# Altium PCB MCU-main-board-PCBPcbDoc.PcbDoc (part 1 of 2)
Units mm, origin at the board's own origin, x right, y up, seen from the top; angles counter-clockwise.
Board outline 55 x 70 mm, 2 copper layers (Top Layer, Bottom Layer); 72 components, 81 nets, 304 pads, 97 vias.
Unrouted connection lines stored in the file: 15.
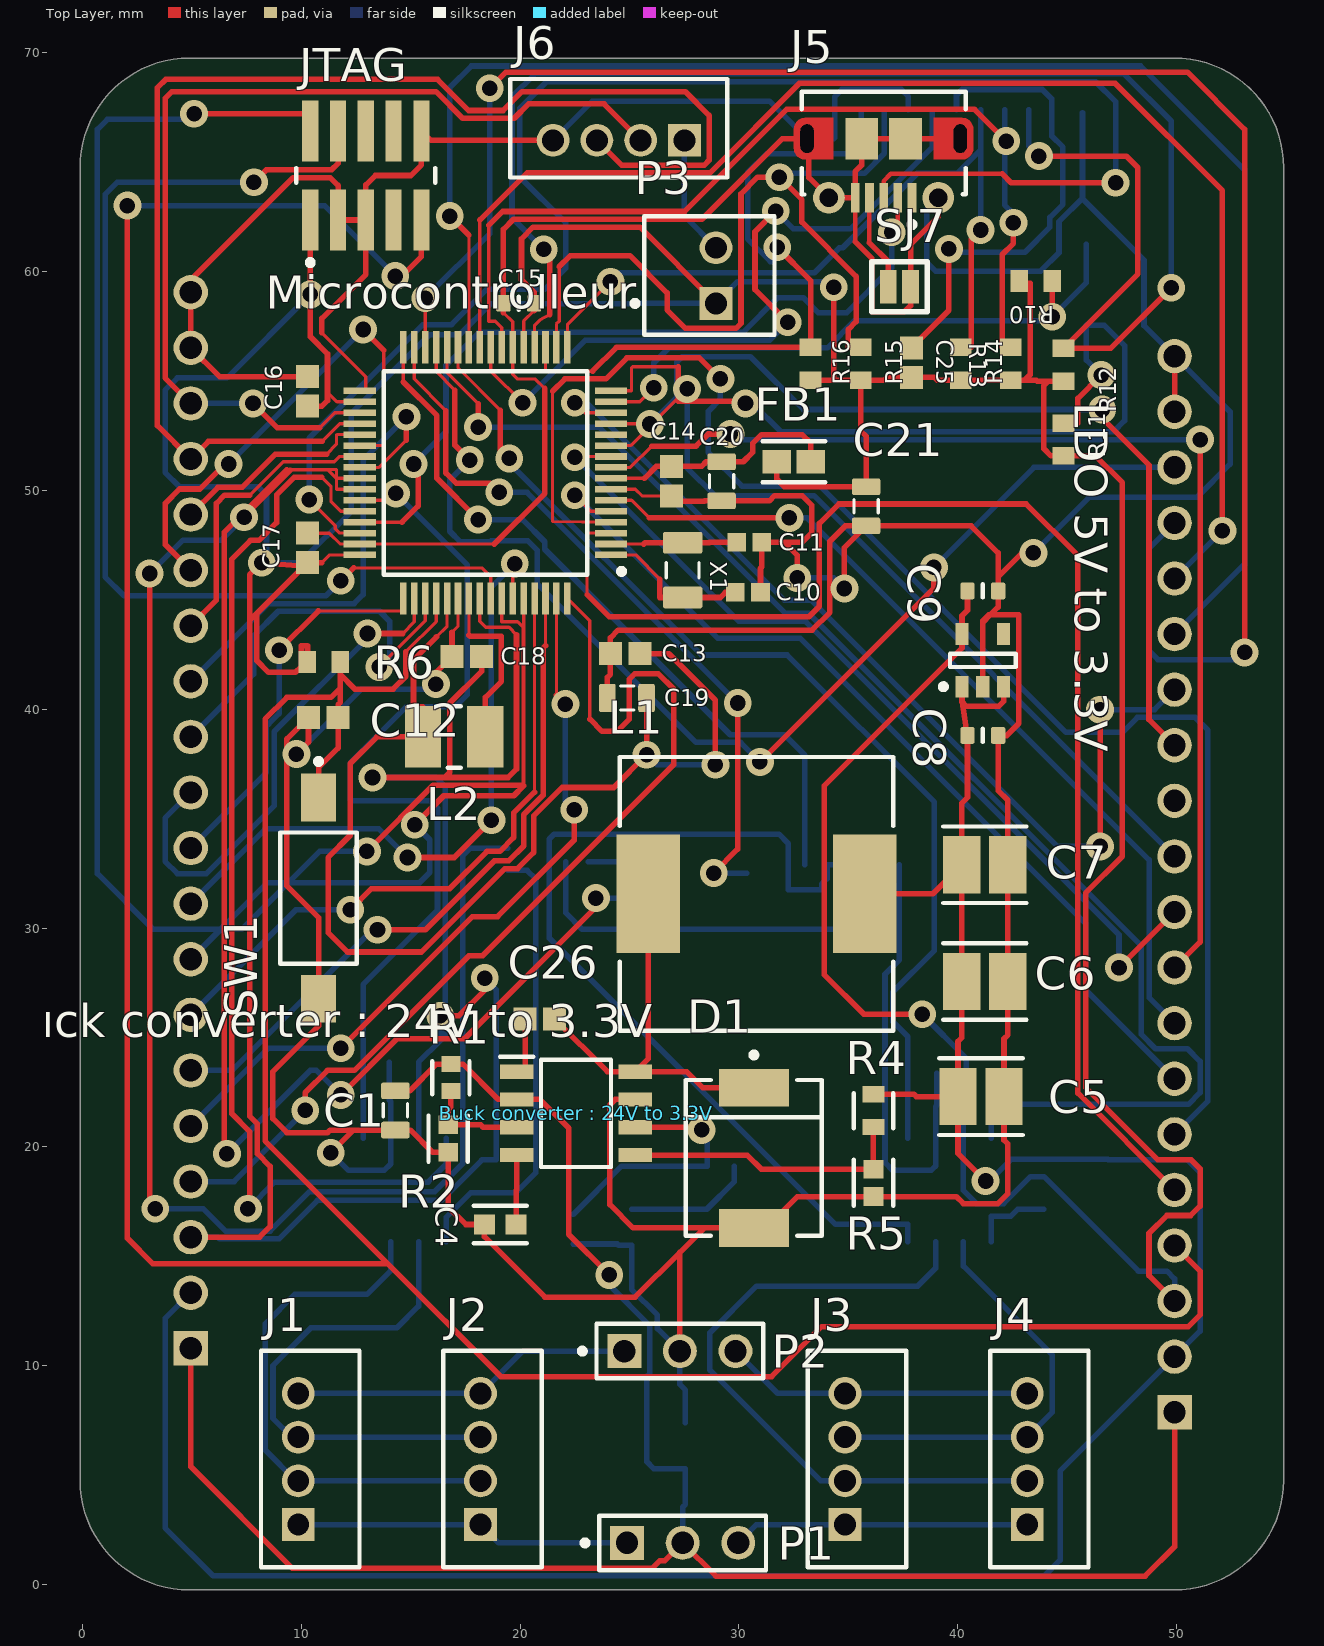
[diagram p0: Top Layer view]
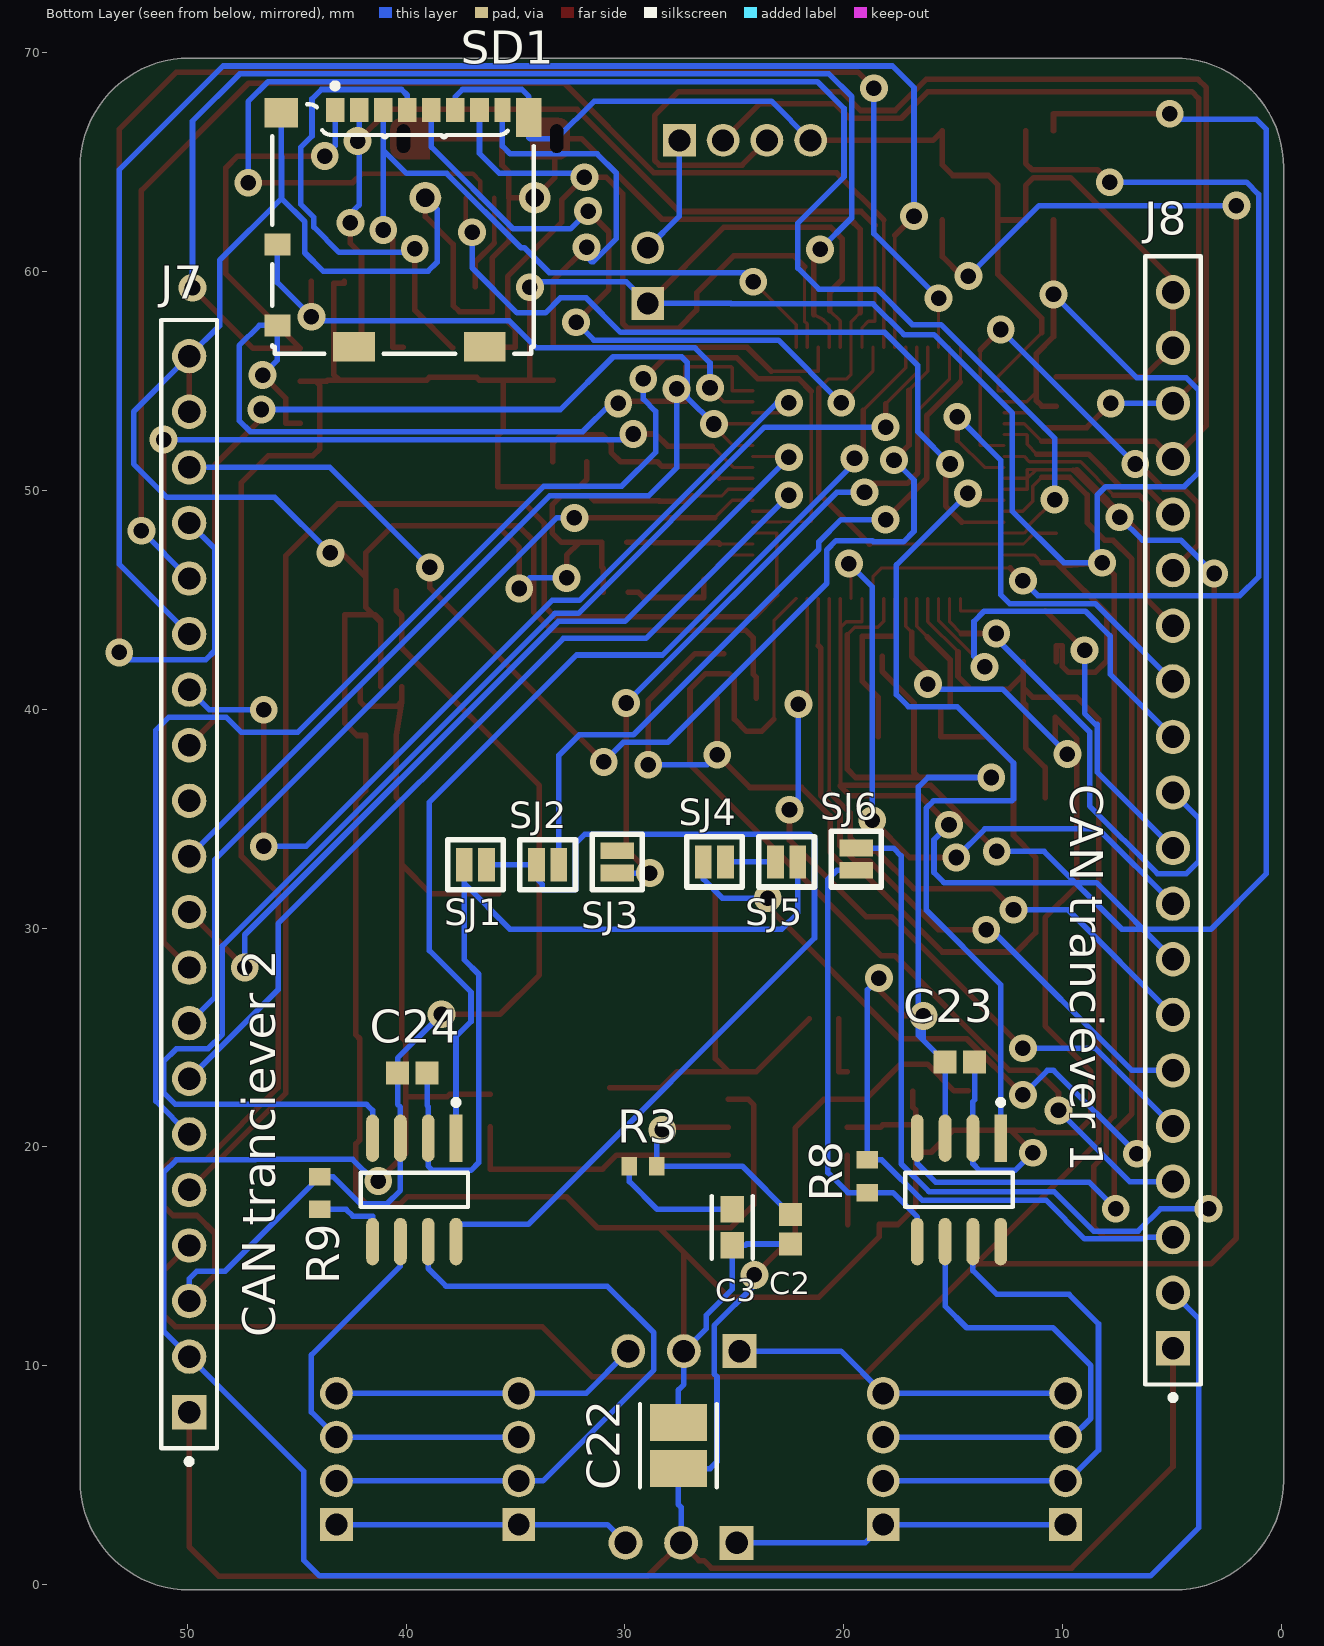
[diagram p1: Bottom Layer view, seen from below]
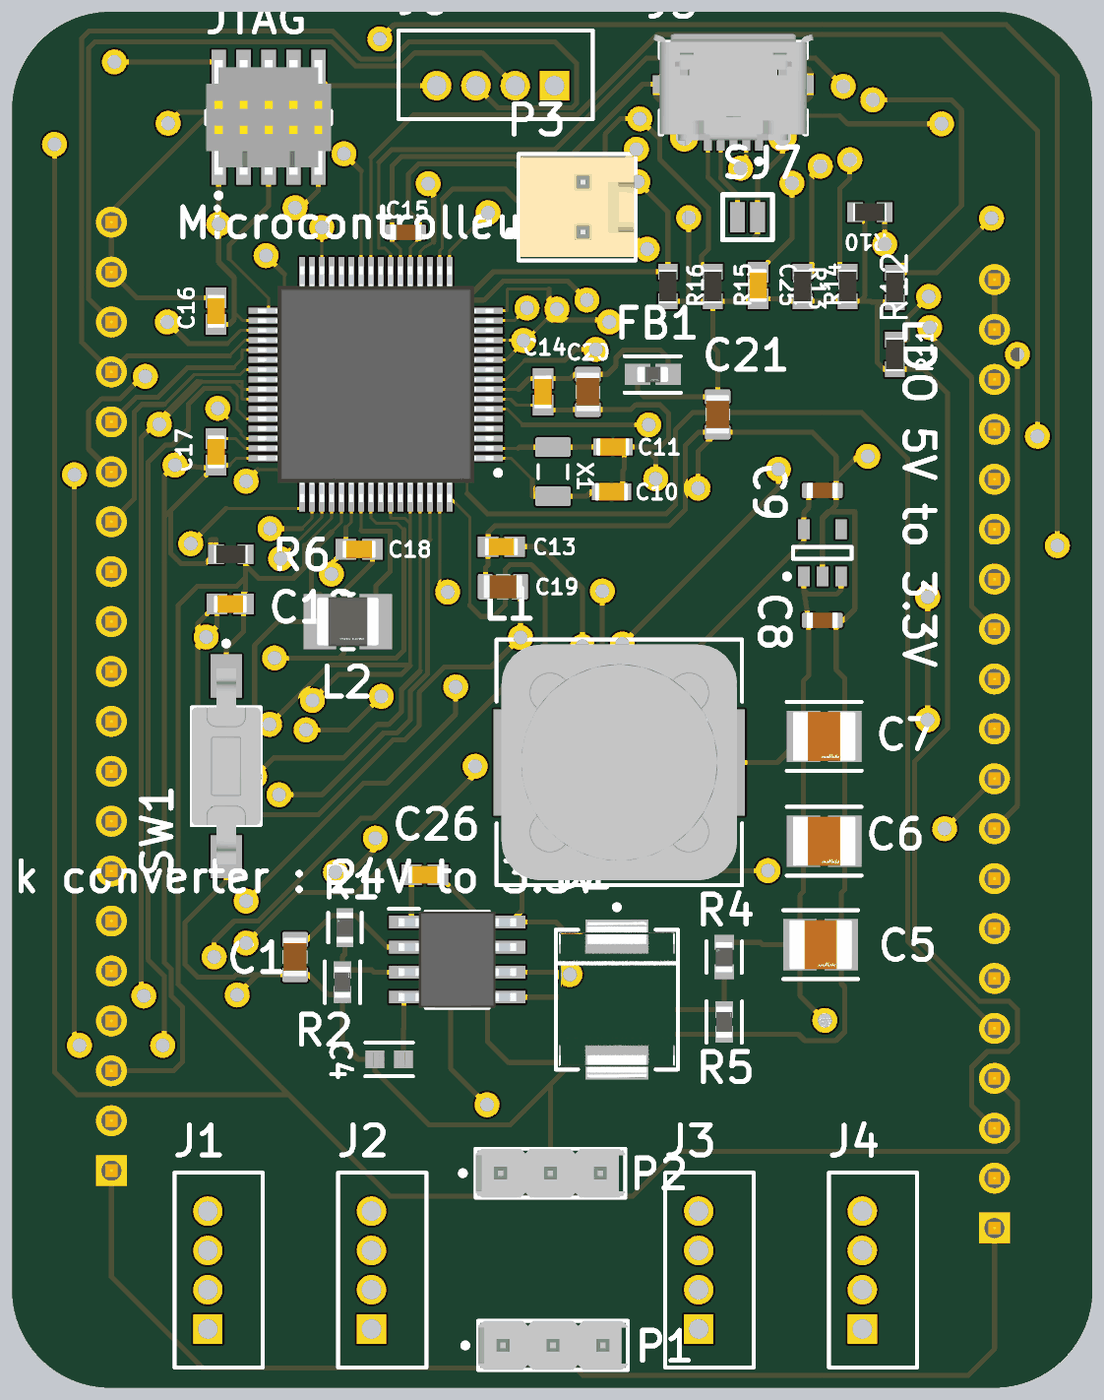
[diagram p3: 3D render of the assembled board from above, using the file's embedded part models]
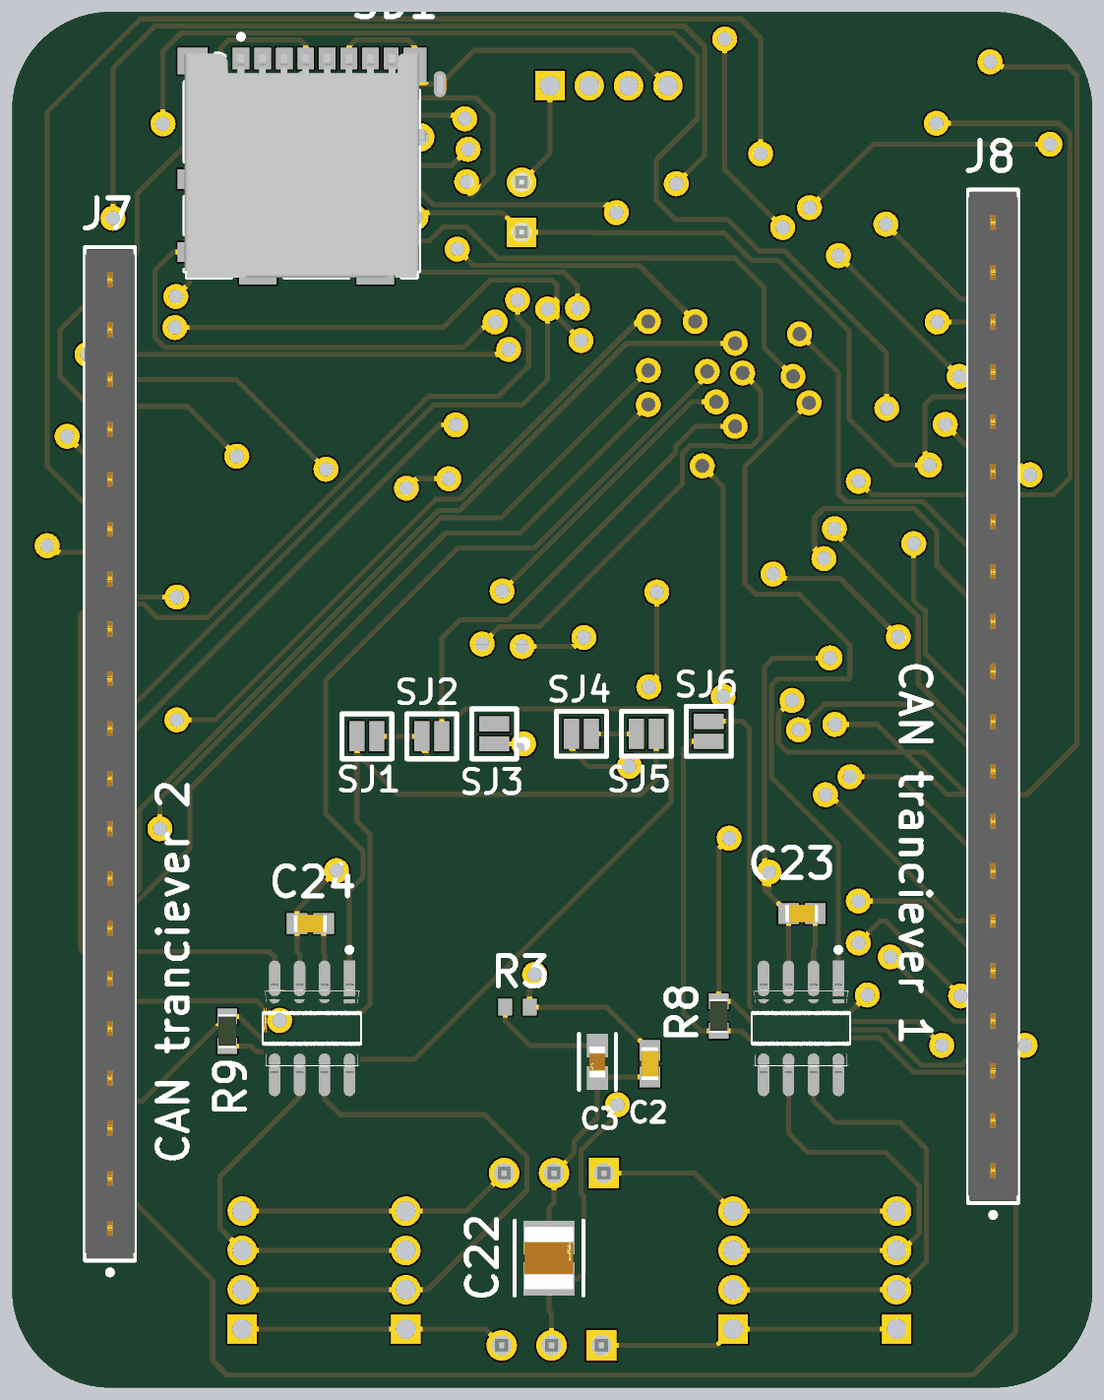
[diagram p4: 3D render of the assembled board from below, using the file's embedded part models]

## Layer stack, top to bottom
Top Solder: solder mask 0.0102, Solder Resist, Dk 3.5
Top Layer: signal copper 0.0356
Dielectric 1: dielectric 0.32, FR-4, Dk 4.8
Bottom Layer: signal copper 0.0356
Bottom Solder: solder mask 0.0102, Solder Resist, Dk 3.5

## Board outline
-0.104,4.755 -0.104,64.755 cw(c4.896,64.755) 4.896,69.755 49.896,69.755 cw(c49.896,64.755) 54.896,64.755 54.896,4.755 cw(c49.896,4.755) 49.896,-0.245 4.896,-0.245 cw(c4.896,4.755)

## Design rules (kind name [scope] priority, off if disabled: settings)
Clearance [All] p1: gap=0.254 ignorepadtopadclearanceinfootprint=TRUE except(0: Arc-Hole Track-Hole SMDPad-Hole THPad-Hole Via-Hole Fill-Hole Poly-Hole Region-Hole Text-Hole; 0.1: Arc-Arc Arc-Track Track-Track SMDPad-SMDPad)
PolygonConnect [All] p1: connectstyle=Relief reliefconductorwidth=0.254 reliefentries=4 polygonreliefangle="90 Angle" airgapwidth=0.254
RoutingVias [All] p1: holewidth=0.711 width=1.27 viastyle="Through Hole" minholewidth=0.711 minwidth=1.27 maxholewidth=0.711 maxwidth=1.27
SMDNeckDown [All] p1: percent=50.000
SolderMaskExpansion [All] p1: expansion=0.102 istentingtop=FALSE
Width [All] p1: maxlimit=1 minlimit=0.1 preferedwidth=0.254 minimp=50.000000 maximp=50.000000 favimp=50.000000
30 further rules are at their usual default settings.

## Classes and differential pairs
component class MCU-main-board-schematic: "Buck converter : 24V to 3.3V" C1 C2 C3 C4 C5 C6 C7 C8 C9 C10 C11 C12 C13 C14 C15 C16 C17 C18 C19 C20 C21 C22 C26 D1 FB1 J7 J8 L1 L2 "LDO 5V to 3.3V" Microcontrolleur R1 R2 R3 R4 R5 R6 SW1 X1
component class MCU-connectors-schematic: C23 C24 C25 "CAN tranciever 1" "CAN tranciever 2" J1 J2 J3 J4 J5 J6 JTAG P1 P2 P3 R8 R9 R10 R11 R12 R13 R14 R15 R16 SD1 SJ1 SJ2 SJ3 SJ4 SJ5 SJ6 SJ7

## Components (designator, comment, footprint, x,y, rotation, side; value= is the part's Value field where it differs from the comment)
"Buck converter : 24V to 3.3V" "TPS54233QDRQ1" SOIC127P600X175-8N 22.558,21.532 r0 top
C1 "Capacitor 10µF +/-20% 25V 0805" CAPC0805(2012)145_L 14.303,21.67 r90 top value=10µF
C2 "Capacitor 10 pF +/- 5% 50 V 0603" CAPC1608X90X40ML10T20 22.431,16.238 r90 bottom value=10pF
C3 "1nF" FP-0603-L_1_6_0_15-W_0_81-IPC_A 25.098,16.325 r270 bottom
C4 "8.2nF" FP-CL10-IPC_B 19.094,16.452 r180 top
C5 "47uF" FP-GRM32E-0_3-0_2-IPC_C 41.065,22.294 r0 top
C6 "47uF" FP-GRM32E-0_3-0_2-IPC_C 41.24,27.559 r0 top
C7 "47uF" FP-GRM32E-0_3-0_2-IPC_C 41.24,32.893 r0 top
C8 "Capacitor 1µF +/-40% 50V 0603" CAPC0603(1608)100_L 41.148,38.8 r180 top value=1µF
C9 "Capacitor 1µF +/-40% 50V 0603" CAPC0603(1608)100_L 41.148,45.404 r180 top value=1µF
C10 "18pF" CAPC1608X90X40LL10T20 30.413,45.339 r180 top
C11 "18pF" CAPC1608X90X40LL10T20 30.48,47.625 r180 top
C12 "Capacitor 100 nF +/-10% 50 V 0603" CAPC1608X90X40ML10T20 11.009,39.624 r0 top value=100nF
C13 "Capacitor 100 nF +/-10% 50 V 0603" CAPC1608X90X40ML10T20 24.805,42.545 r0 top value=100nF
C14 "Capacitor 100 nF +/-10% 50 V 0603" CAPC1608X90X40ML10T20 26.924,50.419 r90 top value=100nF
C15 "Capacitor 1µF +/-40% 50V 0603" CAPC0603(1608)100_L 19.939,58.547 r0 top value=1µF
C16 "Capacitor 100 nF +/-10% 50 V 0603" CAPC1608X90X40ML10T20 10.287,54.523 r270 top value=100nF
C17 "Capacitor 100 nF +/-10% 50 V 0603" CAPC1608X90X40ML10T20 10.287,47.371 r270 top value=100nF
C18 "Capacitor 100 nF +/-10% 50 V 0603" CAPC1608X90X40ML10T20 17.566,42.418 r0 top value=100nF
C19 "Capacitor 4.7µF +/-40% 25V 0805" CAPC0805(2012)145_L 24.892,40.513 r0 top value=4.7µF
C20 "Capacitor 10µF +/-20% 25V 0805" CAPC0805(2012)145_L 29.21,50.419 r90 top value=10µF
C21 "Capacitor 10µF +/-20% 25V 0805" CAPC0805(2012)145_L 35.814,49.276 r90 top value=10µF
C22 "47uF" FP-GRM32E-0_3-0_2-IPC_C 27.559,6.35 r90 bottom
C23 "Capacitor 100 nF +/-10% 50 V 0603" CAPC1608X90X40ML10T20 14.692,23.876 r0 bottom value=100nF
C24 "Capacitor 100 nF +/-10% 50 V 0603" CAPC1608X90X40ML10T20 39.711,23.368 r0 bottom value=100nF
C25 "Capacitor 100 nF +/-10% 50 V 0603" CAPC1608X90X40ML10T20 37.879,55.838 r270 top value=100nF
C26 "Capacitor 100 nF +/-10% 50 V 0603" CAPC1608X90X40ML10T20 20.907,25.85 r180 top value=100nF
"CAN tranciever 1" "TCAN337GDR" FP-D0008A-IPC_B 14.732,18.034 r270 bottom
"CAN tranciever 2" "TCAN337GDR" FP-D0008A-IPC_B 39.624,18.034 r270 bottom
D1 "500mV, 3A" FP-95402-MFG 30.686,19.5 r270 top
FB1 "BLM18SG221TN1D" FP-BLM18-0_15-t0_5-IPC_A 32.512,51.308 r0 top
J1 "S04B-PASK-2-LF-SN" JST-B4B-PH-K-S_V 10.414,5.737 r90 top
J2 "S04B-PASK-2-LF-SN" JST-B4B-PH-K-S_V 18.743,5.737 r90 top
J3 "S04B-PASK-2-LF-SN" JST-B4B-PH-K-S_V 35.401,5.737 r90 top
J4 "S04B-PASK-2-LF-SN" JST-B4B-PH-K-S_V 43.73,5.737 r90 top
J5 "Micro-USB B" USB-MICRO-B_V 36.616,64.723 r180 top
J6 "S04B-PASK-2-LF-SN" JST-B4B-PH-K-S_V 24.511,66.548 r180 top
J7 "ESQ-120-14-G-S" FP-ESQ-120-14-G-S-MFG 49.911,32.004 r90 bottom
J8 "ESQ-120-14-G-S" FP-ESQ-120-14-G-S-MFG 4.953,34.925 r90 bottom
JTAG "FTSH-105-01-L-DV-K" SMTC-FTSH-105-01-L-DV-K_V 12.954,64.392 r0 top
L1 "33uH, 45mOhm" WE-PD-XXL 30.813,31.565 r0 top
L2 "10uH" FP-CB3225-IPC_A 16.989,38.735 r0 top
"LDO 5V to 3.3V" "AP7365-33WG-7" SOT95P245X110-5N 41.148,42.229 r90 top
Microcontrolleur "ATSAME51J20A-AF" QFP50P1200X1200X120-64N 18.415,50.8 r180 top
P1 "22-28-4033" MOLX-22-28-4033_V 27.432,1.905 r0 top
P2 "22-28-4033" MOLX-22-28-4033_V 27.305,10.668 r0 top
P3 "61900211121" 61900211121 28.656,59.817 r270 top
R1 "169kOhm" FP-CRCW0603-e3-IPC_C 16.843,23.163 r90 top
R2 "19.6kOhm" FP-RR0816-IPC_C 16.716,20.38 r90 top
R3 "52.3kOhm" RESC1608X55X30LL15T15 29.172,19.119 r180 bottom
R4 "10.2kOhm, 1%" FP-CRCW0603-e3-MFG 36.147,21.659 r90 top
R5 "1.96kOhm, 1%" FP-RR0816-IPC_C 36.147,18.357 r90 top
R6 "Resistor 10k +/-1% 0603 100 mW" RESC1608X55X25ML10T15 11.037,42.164 r0 top value=10k
R8 "Resistor 10k +/-1% 0603 100 mW" RESC1608X55X25ML10T15 18.923,18.657 r270 bottom value=10k
R9 "Resistor 10k +/-1% 0603 100 mW" RESC1608X55X25ML10T15 43.942,17.895 r270 bottom value=10k
R10 "Resistor 10k +/-1% 0603 100 mW" RESC1608X55X25ML10T15 43.573,59.563 r0 top value=10k
R11 "Resistor 10k +/-1% 0603 100 mW" RESC1608X55X25ML10T15 44.831,52.324 r90 top value=10k
R12 "Resistor 10k +/-1% 0603 100 mW" RESC1608X55X25ML10T15 44.831,55.741 r90 top value=10k
R13 "Resistor 10k +/-1% 0603 100 mW" RESC1608X55X25ML10T15 42.426,55.788 r90 top value=10k
R14 "Resistor 10k +/-1% 0603 100 mW" RESC1608X55X25ML10T15 40.14,55.788 r90 top value=10k
R15 "Resistor 10k +/-1% 0603 100 mW" RESC1608X55X25ML10T15 35.568,55.788 r90 top value=10k
R16 "Resistor 10k +/-1% 0603 100 mW" RESC1608X55X25ML10T15 33.282,55.788 r90 top value=10k
SD1 "104031-0811" MOLX-104031-0811_V 40.132,61.976 r0 bottom
SJ1 "custom Solder bridge" "custom Solder bridge-Footprint-1" 36.83,32.893 r180 bottom
SJ2 "custom Solder bridge" "custom Solder bridge-Footprint-1" 33.528,32.893 r0 bottom
SJ3 "custom Solder bridge" "custom Solder bridge-Footprint-1" 30.353,33.02 r90 bottom
SJ4 "custom Solder bridge" "custom Solder bridge-Footprint-1" 22.606,33.02 r0 bottom
SJ5 "custom Solder bridge" "custom Solder bridge-Footprint-1" 25.908,33.02 r180 bottom
SJ6 "custom Solder bridge" "custom Solder bridge-Footprint-1" 19.431,33.147 r270 bottom
SJ7 "custom Solder bridge" "custom Solder bridge-Footprint-1" 37.338,59.309 r180 top
SW1 "FSMSM" TECO-FSMSM-2_V 10.795,31.369 r270 top
X1 "32.768kHz" EPSON-FC-135_V 27.432,46.355 r90 top

## Footprints (in the part's own frame and the unit in brackets; to place one, negate y for a bottom-side part, rotate by r counter-clockwise, add the part's x,y. Pads: shape width x height; smd on the part's side, far side on the other; paste and mask are expansions set on the pad)
61900211121 [mm] "2.54mm Male Locking Header, 2p"
  rect 1.5x1.5 hole 1: 1(1.27,0.3)
  round 1.5 hole 1: 2(-1.27,0.3)
  silkscreen extent -2.71,-3.52 2.71,2.97, body extent -2.54,-2.9 2.54,2.9, height 11.53
CAPC0603(1608)100_L [mm] "Chip Capacitor, Body 1.6x0.8mm, Height 1.0mm, IPC High Density"
  rrect25% 0.66x0.76 smd: 1(-0.7,0) 2(0.7,0)
  silkscreen extent 0,-0.3 0,0.3, body extent -0.8,-0.4 0.8,0.4, height 0.95
CAPC0805(2012)145_L [mm] "Chip Capacitor, Body 2.0x1.2mm, Height 1.45mm, IPC High Density"
  rrect25% 0.76x1.3 smd: 1(-0.9,0) 2(0.89,0)
  silkscreen extent -0.3,-0.55 0.3,0.55, body extent -1,-0.6 1,0.6, height 1.45
CAPC1608X90X40LL10T20 [mm] "Chip Capacitor, 2-Leads, Body 1.7x0.9mm, IPC High Density"
  rect 0.85x0.85 smd: 1(-0.575,0) 2(0.575,0)
  body extent -0.85,-0.45 0.85,0.45, height 0.9
CAPC1608X90X40ML10T20 [mm] "Chip Capacitor, 2-Leads, Body 1.70x0.90mm, IPC Low Density"
  rect 1.05x1.05 smd: 1(-0.675,0) 2(0.675,0)
  body extent -0.85,-0.45 0.85,0.45, height 0.9
"custom Solder bridge-Footprint-1" [mil]
  rect 30x60 smd: 1(-20,0) 2(20,0)
  silkscreen extent -50,-45 50,45
EPSON-FC-135_V [mm] "SMD, 2-Leads, Body 3.2x1.5mm"
  rrect20% 1x1.8 smd: 1(-1.25,0) 2(1.25,0)
  silkscreen extent -0.35,-0.75 0.35,0.75, body extent -1.6,-0.75 1.6,0.75, height 0.9
FP-0603-L_1_6_0_15-W_0_81-IPC_A [mil]
  rect 47.5x42.06 smd paste+0 mask+0: 1(-32.51,0) 2(32.51,0)
  silkscreen extent -56,-37 56,37, body extent -31,-16 31,16, height 35
FP-95402-MFG [mm]
  rect 1.72x3.2 smd paste+0 mask+0: 1(-3.205,0) 2(3.205,0)
  silkscreen extent -4.82,-3.11 3.55,3.11, body extent -4.17,-3.21 4.17,3.21, height 0.25
FP-BLM18-0_15-t0_5-IPC_A [mm]
  rect 1.306x1.058 smd paste+0 mask+0: 1(-0.776,0) 2(0.776,0)
  silkscreen extent -1.43,-0.93 1.43,0.93, body extent -1.93,-1.03 1.93,1.03, height 0.25
FP-CB3225-IPC_A [mm]
  rect 1.654x2.806 smd paste+0 mask+0: 1(-1.426,0) 2(1.426,0)
  silkscreen extent -0.3,-1.4 0.3,1.4, body extent -2.75,-1.9 2.75,1.9, height 0.25
FP-CL10-IPC_B [mm]
  rect 0.958x0.912 smd paste+0 mask+0: 1(-0.727,0) 2(0.727,0)
  silkscreen extent -1.21,-0.86 1.21,0.86, body extent -1.46,-0.71 1.46,0.71, height 0.25
FP-CRCW0603-e3-IPC_C [mm]
  rect 0.735x0.862 smd paste+0 mask+0: 1(-0.615,0) 2(0.615,0)
  silkscreen extent -0.75,-0.85 0.75,0.85, body extent -1.08,-0.58 1.08,0.58, height 0.25
FP-CRCW0603-e3-MFG [mm]
  rect 0.75x1 smd paste+0 mask+0: 1(-0.75,0) 2(0.75,0)
  silkscreen extent -0.8,-0.9 0.8,0.9, body extent -1.22,-0.6 1.22,0.6, height 0.25
FP-D0008A-IPC_B [mm]
  rect 2.169x0.582 smd paste+0 mask+0: 1(-2.364,1.905)
  rrect100% 2.169x0.582 smd paste+0 mask+0: 2(-2.364,0.635) 3(-2.364,-0.635) 4(-2.364,-1.905) 5(2.364,-1.905) 6(2.364,-0.635) 7(2.364,0.635) 8(2.364,1.905)
  silkscreen extent -4.12,-2.45 0.78,2.45, body extent -3,-2.45 3,2.45, height 1.75
FP-ESQ-120-14-G-S-MFG [mm]
  rect 1.57x1.57 hole 1.02 paste-1000 mask+0: 1(-24.13,0)
  round 1.57 hole 1.02 paste-1000 mask+0: 2(-21.59,0) 3(-19.05,0) 4(-16.51,0) 5(-13.97,0) 6(-11.43,0) 7(-8.89,0) 8(-6.35,0) 9(-3.81,0) 10(-1.27,0) 11(1.27,0) 12(3.81,0) 13(6.35,0) 14(8.89,0) 15(11.43,0) 16(13.97,0) 17(16.51,0) 18(19.05,0) 19(21.59,0) 20(24.13,0)
  silkscreen extent -26.51,-1.27 25.78,1.27, body extent -25.65,-1.27 25.65,1.27, height 11.3
FP-GRM32E-0_3-0_2-IPC_C [mm]
  rect 1.703x2.606 smd paste+0 mask+0: 1(-1.051,0) 2(1.051,0)
  silkscreen extent -1.9,-1.75 1.9,1.75, body extent -2,-1.45 2,1.45, height 0.25
FP-RR0816-IPC_C [mm]
  rect 0.855x0.906 smd paste+0 mask+0: 1(-0.626,0) 2(0.626,0)
  silkscreen extent -1.05,-0.9 1.05,0.9, body extent -1.15,-0.6 1.15,0.6, height 0.25
JST-B4B-PH-K-S_V [mm] "Connector, 4-Leads, Body 9.9x4.5mm, Pitch 2mm"
  rect 1.5x1.5 hole 1: 1(-3,0.55)
  round 1.5 hole 1: 2(-1,0.55) 3(1,0.55) 4(3,0.55)
  silkscreen extent -4.95,-2.25 4.95,2.25, body extent -4.95,-2.25 4.95,2.25, height 6
MOLX-22-28-4033_V [mm] "THD, 3-Leads, Body 7.62x2.49mm, Pitch 2.54mm"
  rect 1.55x1.55 hole 1.02: 1(-2.54,0)
  round 1.55 hole 1.02: 2(0,0) 3(2.54,0)
  silkscreen extent -4.58,-1.25 3.81,1.25, body extent -3.81,-1.24 3.81,1.24, height 8.38
MOLX-104031-0811_V [mm] "Micro SD, 8-Leads, Body 11.95x11.4mm, Pitch 1.1mm"
  rect 0.85x1.1 smd: 1(3.113,-5.412) 2(2.012,-5.412) 3(0.913,-5.412) 4(-0.188,-5.412) 5(-1.287,-5.412) 6(-2.387,-5.412) 7(-3.488,-5.412)
  rect 0.75x1.1 smd: 8(-4.538,-5.412)
  rect 1.2x1 smd: 9(5.748,0.738) 10(5.748,4.437)
  rect 1.55x1.35 smd: 11(5.573,-5.288)
  rect 1.17x1.8 smd: 12(-5.748,-5.063)
  rect 1.9x1.35 smd: 13(-3.723,5.412) 14(2.247,5.412)
  silkscreen extent -5.97,-6.64 5.98,5.74, body extent -5.97,-5.66 5.98,5.74, height 1.45
QFP50P1200X1200X120-64N [mm]
  rect 1.475x0.3 smd: 1(-5.738,3.75) 2(-5.738,3.25) 3(-5.738,2.75) 4(-5.738,2.25) 5(-5.738,1.75) 6(-5.738,1.25) 7(-5.738,0.75) 8(-5.738,0.25) 9(-5.738,-0.25) 10(-5.738,-0.75) 11(-5.738,-1.25) 12(-5.738,-1.75) 13(-5.738,-2.25) 14(-5.738,-2.75) 15(-5.738,-3.25) 16(-5.738,-3.75) 33(5.738,-3.75) 34(5.738,-3.25) 35(5.738,-2.75) 36(5.738,-2.25) 37(5.738,-1.75) 38(5.738,-1.25) 39(5.738,-0.75) 40(5.738,-0.25) 41(5.738,0.25) 42(5.738,0.75) 43(5.738,1.25) 44(5.738,1.75) 45(5.738,2.25) 46(5.738,2.75) 47(5.738,3.25) 48(5.738,3.75)
  rect 0.3x1.475 smd: 17(-3.75,-5.738) 18(-3.25,-5.738) 19(-2.75,-5.738) 20(-2.25,-5.738) 21(-1.75,-5.738) 22(-1.25,-5.738) 23(-0.75,-5.738) 24(-0.25,-5.738) 25(0.25,-5.738) 26(0.75,-5.738) 27(1.25,-5.738) 28(1.75,-5.738) 29(2.25,-5.738) 30(2.75,-5.738) 31(3.25,-5.738) 32(3.75,-5.738) 49(3.75,5.738) 50(3.25,5.738) 51(2.75,5.738) 52(2.25,5.738) 53(1.75,5.738) 54(1.25,5.738) 55(0.75,5.738) 56(0.25,5.738) 57(-0.25,5.738) 58(-0.75,5.738) 59(-1.25,5.738) 60(-1.75,5.738) 61(-2.25,5.738) 62(-2.75,5.738) 63(-3.25,5.738) 64(-3.75,5.738)
  silkscreen extent -6.35,-4.65 4.65,4.65, body extent -6,-6 6,6, height 1.2
RESC1608X55X25ML10T15 [mm] "Chip Resistor, 2-Leads, Body 1.70x0.90mm, IPC Low Density"
  rect 0.8x1 smd: 1(-0.75,0) 2(0.75,0)
  body extent -0.85,-0.45 0.85,0.45, height 0.55
RESC1608X55X30LL15T15 [mm] "Chip Resistor, 2-Leads, Body 1.60x0.80mm, IPC High Density"
  rect 0.7x0.85 smd: 1(-0.625,0) 2(0.625,0)
  body extent -0.87,-0.48 0.87,0.48, height 0.55
SMTC-FTSH-105-01-L-DV-K_V [mm] "CONN, 10-Leads, Body 6.35x3.43mm, Pitch 1.27mm"
  rect 0.74x2.79 smd: 1(-2.54,-2.035) 2(-2.54,2.035) 3(-1.27,-2.035) 4(-1.27,2.035) 5(0,-2.035) 6(0,2.035) 7(1.27,-2.035) 8(1.27,2.035) 9(2.54,-2.035) 10(2.54,2.035)
  silkscreen extent -3.17,-4.1 3.17,0.34, body extent -3.17,-2.92 3.18,2.92, height 6.12
SOIC127P600X175-8N [mm]
  rect 1.525x0.65 smd: 1(-2.712,1.905) 2(-2.712,0.635) 3(-2.712,-0.635) 4(-2.712,-1.905) 5(2.712,-1.905) 6(2.712,-0.635) 7(2.712,0.635) 8(2.712,1.905)
  silkscreen extent -3.47,-2.45 1.6,2.58, body extent -3,-2.45 3,2.45, height 1.75
SOT95P245X110-5N [mm] "SOT23, 5-Leads, Body 2,90x2,45mm, Pitch 0,95mm, IPC Medium Density"
  rect 1x0.6 smd: 1(-1.2,0.95) 2(-1.2,0) 3(-1.2,-0.95) 4(1.2,-0.95) 5(1.2,0.95)
  silkscreen extent -1.32,-1.5 0.3,1.92, body extent -0.7,-1.5 0.7,1.5, height 1.1
TECO-FSMSM-2_V [mm] "SMD, 2-Leads, Body 6x3.5mm, Pitch 9.19mm"
  rect 2.2x1.6 smd: 1(-4.595,0)
  rect 2.18x1.6 smd: 2(4.595,0)
  silkscreen extent -6.37,-1.75 3,1.75, body extent -4.98,-1.75 4.98,1.75, height 4.4
USB-MICRO-B_V [mm] "USB, MICRO B, Body 7.491x4.695 mm, Pitch 0.65 mm"
  rect 0.4x1.35 smd: 1(-1.3,1.35) 2(-0.65,1.35) 3(0,1.35) 4(0.65,1.35) 5(1.3,1.35)
  round 1.45 hole 0.85: 6(-2.5,1.35) 7(2.5,1.35)
  rrect50% 0x0 hole 0.6 slot 1.3 at 90 deg: 8(-3.5,-1.35) 11(3.5,-1.35)
  rect 1.5x1.9 smd: 9(-1,-1.35) 10(1,-1.35)
  Top Layer circle w0.5: c3.6,-1.8 r0.25
  Top Layer region: -2.3,-2.3 -2.3,-0.4 -3.6,-0.4 -3.6,-2.3
  Top Layer region: 2.3,-0.4 2.3,-2.3 3.6,-2.3 3.6,-0.4
  Top Layer region: 3.6,-0.9 3.6,-1.8 4.1,-1.8 4.1,-0.9
  Top Layer region: -3.6,-1.8 -3.6,-0.9 -4.1,-0.9 -4.1,-1.8
  Top Layer lines w0.5: -3.85,-0.9 ccw(c-3.6,-0.9) -3.5,-1.129 ccw(c-3.6,-0.9) -3.5,-0.671 ccw(c-3.6,-0.9) -3.85,-0.9 ; -3.85,-0.9 ccw(c-3.6,-0.9) -3.85,-0.9 ; -3.85,-1.8 ccw(c-3.6,-1.8) -3.85,-1.8 ; -3.85,-1.8 ccw(c-3.6,-1.8) -3.85,-1.8 ; 3.835,-0.985 ccw(c3.6,-0.9) 3.5,-0.671 ccw(c3.6,-0.9) 3.422,-0.725 ccw(c3.6,-0.9) 3.418,-0.728 ccw(c3.6,-0.9) 3.35,-0.9 ccw(c3.6,-0.9) 3.5,-1.129 ccw(c3.6,-0.9) 3.75,-1.1 ccw(c3.6,-0.9) 3.8,-1.05 ccw(c3.6,-0.9) 3.835,-0.985
  silkscreen extent -3.75,-3.5 3.75,2.7, body extent -4.1,-3.9 4.1,1.5, height 2.67
WE-PD-XXL [mm] "SMD Inductor, 2-Leads, Body 12.0 x 12.0 mm"
  rect 2.9x5.4 smd: 1(-4.95,0) 2(4.95,0)
  silkscreen extent -6.25,-6.25 6.25,6.25, body extent -6,-6 6,6, height 10.36

## Part data
"Buck converter : 24V to 3.3V": "Integrated Circuit", Manufacturer_Name="Texas Instruments", Mouser Part Number=595-TPS54233QDRQ1, Arrow Part Number=TPS54233QDRQ1, Arrow Price/Stock=https://www.arrow.com/en/products/tps54233qdrq1/texas-instruments, Datasheet Link=http://www.ti.com/lit/gpn/tps54233-q1, Height=1.75mm, Manufacturer_Part_Number=TPS54233QDRQ1, Mouser Price/Stock=https://www.mouser.co.uk/ProductDetail/Texas-Instruments/TPS54233QDRQ1?qs=5771e39Rz9EgVp4sSedJGA%3D%3D
C1 C20 C21: library part CMP-001-00079-2, "Chip Capacitor, 10µF +/-20%, 25V, 0805, Thickness 1.45 mm", Case/Package=0603, Max Operating Temperature=85°C, Min Operating Temperature=-55°C, Tolerance=10%, Voltage Rating=25V, Mounting Technology=SMT, Pins=2
C2: library part CMP-001-00014-4, "Chip Capacitor, 10 pF, +/- 5%, 50 V, 0603 (1608 Metric)", Capacitor Type=Ceramic, Case/Package=0603, Max Operating Temperature=125°C, Min Operating Temperature=-55°C, Tolerance=5%, Voltage Rating=50V, Mounting Technology=SM, Pins=2, RoHS Compliant=True
C3: library part CMP-2006-04378-2, "General Purpose Ceramic Capacitor, 0603, 1nF, 10%, X7R, 15%, 50V", Case Code (Imperial)=0603, Case Code (Metric)=1608, Dielectric=X7R, Dielectric Material=Ceramic, Max Operating Temperature=125°C, Min Operating Temperature=-55°C, Package Quantity=4000, Tolerance=10%, Voltage=50V, Capacitance=1nF, Case/Package=0603, Construction=Flat, Contact Plating=Tin, Depth=0.81mm, Height=0.9mm, Lead Free="Lead Free", Length=1.6mm, Mount="Surface Mount", Number of Pins=2, Packaging="Tape and Reel", Radiation Hardening=No, REACH SVHC="No SVHC", RoHS Compliant=Yes, Series=-, Termination=SMD/SMT, Thickness=0.035inch, Voltage Rating=50V, Voltage Rating (DC)=50V, Weight=7.1E-05oz, Width=0.032inch
C4: library part CMP-2000-06097-2, "Cap Ceramic 8.2nF 50V X7R ±10% Pad SMD 0603 +125°C T/R", Case Code (Imperial)=0603, Case Code (Metric)=1608, Dielectric=X7R, Max Operating Temperature=125°C, Min Operating Temperature=-55°C, Package Quantity=1, Tolerance=10%, Voltage=50V, Capacitance=8.2nF, Case/Package=0603, Construction=Flat, Depth=0.8mm, Height=0.8mm, Lead Free="Lead Free", Length=1.6mm, Material=Ceramic, Mount="Surface Mount", Packaging="Tape and Reel", Radiation Hardening=No, RoHS Compliant=Yes, Series=CL, Thickness=0.035inch, Voltage Rating=50V, Voltage Rating (DC)=50V, Width=0.031inch
C5 C6 C7 C22: library part CMP-2000-06362-2, "CAP CER 47UF 16V X5R 1210", Case Code (Imperial)=1210, Case Code (Metric)=3225, Dielectric=X5R, Max Operating Temperature=85°C, Min Operating Temperature=-55°C, Package Quantity=1, Tolerance=10%, Voltage=16V, Capacitance=47uF, Case/Package=1210, Depth=2.5mm, Height=2.5mm, Lead Free="Lead Free", Length=3.2mm, Material=Ceramic, Mount="Surface Mount", Number of Pins=2, Packaging="Cut Tape", Radiation Hardening=No, REACH SVHC="No SVHC", RoHS Compliant=Yes, Termination=SMD/SMT, Thickness=0.106inch, Voltage Rating=16V, Voltage Rating (DC)=16V, Width=0.098inch
C8 C9 C15: library part CMP-001-00078-2, "Chip Capacitor, 1µF +/-40%, 50V, 0603, Thickness 1 mm", Case/Package=0402, Max Operating Temperature=85°C, Min Operating Temperature=-55°C, Tolerance=10%, Voltage Rating=50V, Mounting Technology=SMT, Pins=2
C10 C11: library part CMP-1659-00030-1, "Chip Capacitor, 18 pF, +/- 5%, 50 V, -55 to 125 degC, 0603 (1608 Metric), RoHS, Tape and Reel", Case Code (Imperial)=0603, Case Code (Metric)=1608, Max Operating Temperature="155 degC", Min Operating Temperature="-55 degC", Package Quantity=200, Power Rating="100 mW", Resistance="68.1 Ohm", Tolerance=1%, Voltage Rating="50 V", Case\Package=0603, ComponentLink1Description="Manufacturer URL", ComponentLink1URL=http://www.yageo.com/, ComponentLink2Description=Datasheet, ComponentLink2URL=http://www.yageo.com/NewPortal/yageodocoutput?fileName=/pdf/MLCC/UPY-GP_NP0_16V-to-50V_14.pdf, DatasheetVersion="Rev. 14, 07/2016", Height="0.45 mm", Length="1.6 mm", PackageDescription="2-Pin Surface Mount Device, Body 1.6 x 0.8 mm", PackageReference=0603, Packaging="Tape and Reel", Radiation Hardening=No, RoHSCompliant=true, Width="0.8 mm"
C12 C13 C14 C16 C17 C18 C23 C24 C25 C26: library part CMP-001-00017-4, "Chip Capacitor, 100 nF, +/- 10%, 50 V, 0603 (1608 Metric)", Capacitor Type=Ceramic, Case/Package=0603, Max Operating Temperature=125°C, Min Operating Temperature=-55°C, Tolerance=10%, Voltage Rating=50V, Mounting Technology=SM, Pins=2, RoHS Compliant=True
C19: library part CMP-001-00080-2, "Chip Capacitor, 4.7µF +/-40%, 25V, 0805, Thickness 1.45 mm", Case/Package=0402, Max Operating Temperature=85°C, Min Operating Temperature=-55°C, Tolerance=20%, Voltage Rating=25V, Mounting Technology=SMT, Pins=2
"CAN tranciever 1" "CAN tranciever 2": library part CMP-001-0002-3, "3.3-V CAN Transceivers with CAN FD (Flexible Data Rate) 8-SOIC -40 to 125"
D1: library part CMP-02539-000012-1, "DIODE SCHOTTKY 40V 3A DO214AB", Forward Current=3A, Manufacturer=Vishay, Manufacturer Part Number=SS34-E3/57T, Max Junction Temp=+150°C, Max Repetitive Reverse Voltage=40V, Max Surge Forward Current=100A, Package=95402, Peak Reverse Current=0.5mA, Temperature="-55°C to +150°C", Temperature Range Low=-55°C, Automotive=No, Category=Diode, ComponentLink2Description=Datasheet, ComponentLink2URL=http://www.vishay.com/docs/88751/ss32.pdf, Device Class L1="Discrete Semiconductors", Device Class L2=Diodes, Device Class L3="Schottky Diodes", Digikey Description="DIODE SCHOTTKY 40V 3A DO214AB", Footprint Url=http://www.vishay.com/docs/95402/smc.pdf, Height=2.62mm, Lead Free=Yes, Mouser Description="Schottky Diodes & Rectifiers 3.0 Amp 40 Volt", Octopart=https://octopart.com/ss34-e3%2F57t-vishay-39552907, RoHS=TRUE, Standoff Height=0mm, Temperature Range High=+150°C
FB1: library part CMP-0686-00596-3, "Chip Ferrite Bead, 0603, 220Ω @ 100MHz, 25%, 0.04Ω, 2.5A, BLM18SG221TN1D", Case Code (Imperial)=0603, Case Code (Metric)=1608, Current Rating=2.5A, DC Resistance (DCR)=40mR, Max Operating Temperature=125°C, Min Operating Temperature=-55°C, Package Quantity=1, Test Frequency=100MHz, Tolerance=25%, Case/Package=0603, Core Material=Ferrite, DC Current=2.5A, DC Resistance-Max=40mR, Depth=0.95mm, Height=0.8mm, Impedance=220R, Lead Free="Lead Free", Length=1.6mm, Material=Ferrite, Max Current Rating=2.5A, Max DC Current=2.5A, Number of Circuits=1, Number of Lines=1, Number of Pins=2, Packaging="Tape and Reel", Radiation Hardening=No, REACH SVHC="No SVHC", RoHS Compliant=Yes, Series=BLM18S, Termination=SMD/SMT, Weight=7.1E-05oz, Width=0.8mm
J1 J2 J3 J4: library part CMP-002-00072-2
J5: library part CMP-2000-05827-1, "Micro-USB B Receptacle, Right Angle, Bottom Mount, Surface Mount, with Solder Tabs, -30 to 85 degC, 5-Pin USB, RoHS, Tape and Reel", Manufacturer=Molex, Package Description="5-Leads USB, Micro B, Body 7.5 x 5 mm, Pitch 0.65 mm", Package Reference=MICRO-B, Package Version="Rev. F, 12/2012", Standard Package=1, Voltage - Max=30V, 3D Model=105017-0001.stp, Catalog Drawings=1050170001, Category=Connectors,Interconnects, Circuits=5, Connector Type=USB-microB, Datasheet URL=http://www.molex.com/elqNow/elqRedir.htm?ref=http://www.molex.com/webdocs/datasheets/pdf/en-us/1050170001_IO_CONNECTORS.pdf, Datasheet Version=03/2016, Family=USB,DVI,HDMIConnectors, Featured Product=Micro-USBConnectorsUSBConnectors, Features=Shielded,SolderRetention, Gender=Receptacle, Ingress Protection=-, Manufacturer URL=http://www.molex.com/, Mating Products=WM17145-ND-CABLEMICROUSBBTOSTDA1.0MWM17147-ND-CABLEMICROUSBBTOSTDA2.0MWM17146-ND-CABLEMICROUSBBTOSTDA1.5M, Mounting Technology=SurfaceMount, Mounting Type=BoardCutout,SurfaceMount,RightAngle, Number of Contacts=5, Online Catalog=Molex-MicroUSB, Other Names=WM1399DKR, Package URL=http://www.molex.com/pdm_docs/sd/1050170001_sd.pdf, Packaging=Digi-Reel®, PCN Assembly/Origin=ResinSupplier21/Oct/2015, RoHS Information=1050170001CertofCompliance, Series=-, Specifications=-
J6: library part CMP-002-00074-1
J7 J8: library part CMP-02766-000124-1, "CONN SOCKET 20POS 0.1 GOLD PCB", Color=Black, Contact Resistance=10mR, Max Current Rating=6.9A, Max Operating Temperature=125°C, Max Voltage Rating (AC)=550V, Min Operating Temperature=-55°C, Connector Type=Receptacle, Contact Material=Bronze, Contact Plating=Gold, Depth=2.41mm, Gender=Receptacle, Housing Color=Black, Housing Material=Polyester, Length=51.31mm, Mount="Through Hole", Number of Contacts=20, Number of Positions=20, Number of Rows=1, Orientation=Straight, Packaging=Rail/Tube, Pitch=2.54mm, Radiation Hardening=No, REACH SVHC="No SVHC", Termination=Solder
JTAG: library part CMP-2000-05353-1, "Male Header, Pitch 1.27 mm, 2 x 5 Position, Height 6.25 mm", Color=Black, Manufacturer=Samtec, Package Description="Male Header, Pitch 1.27 mm, 2 x 5 Position, Height 5.97 mm, Tail Length 4.32 mm", Standard Package=1, Category=Connectors,Interconnects, Connector Type=Header,Unshrouded, Contact Finish=Gold, Contact Finish Thickness=10µin(0.25µm), Contact Mating Length="0.120\"(3.05mm)", Contact Type=MalePin, Datasheet URL=http://suddendocs.samtec.com/prints/ftsh-1xx-xx-xxx-dv-xxx-mkt.pdf, Datasheet Version="Rev. ET, 10/1995", Family=RectangularConnectors-Headers,MalePins, Manufacturer URL=http://www.samtec.com/, Mating Products="SFMC-105-L2-S-D-TR-ND / -CONN.05\"SURFACE10POSSMT / FLE-105-01-G-DV-TR-ND / -CONNSKT1.27MM10POSDUALSMD / FLE-105-01-G-DV-A-P-ND / -CONNSKT1.27MM10POSDUALSMD / FLE-105-01-G-DV-A-ND / -CONNSKT1.27MM10POSDUALSMD / CLP-105-02-G-D-P-TR-ND / -CONNRCPT10POSDUAL.05\"SMD / SAM1155-05-ND / -CONNRCPT10POSDUAL.05\"SMD / SAM1154-05-ND / -CONNRCPT10POSDUAL.05\"SMD / SAM1153-05-ND / -CONNRCPT10POSDUAL.05\"SMD / SAM1226-05-ND / -CONNRCPT.05\"10POSDUALSMD", Mounting Type=SurfaceMount, Number of Positions=10, Number of Positions Loaded=All, Number of Rows=2, Other Names=Q3937619, Package Reference=FTSH-105-01-L-DV-K, Package URL=http://suddendocs.samtec.com/prints/ftsh-1xx-xx-xxx-dv-xxx-footprint.pdf, Packaging=Tube, Pitch="0.050\"(1.27mm)", Product Training Modules=Board-to-BoardConnectors, Row Spacing="0.050\"(1.27mm)", Series=FTSH, Termination=Solder
L1: library part CMP-0227-00179-1, "SMD-Shielded Power Inductor WE-PD, L = 33.0 µH", Inductance="33.0 ÂµH", ComponentLink1Description="Manufacturer Link", ComponentLink1URL=http://www.we-online.com, ComponentLink2Description=Datasheet, ComponentLink2URL=http://www.we-online.de/katalog/media/pdf/7447709330.pdf, DatasheetVersion="ver 1, Oct-2004", PackageDescription="SMD Inductor, 2-Leads, Body 12.0 x 12.0 mm", PackageReference=WE-PD-XXL, PackageVersion=2004
L2: library part CMP-14484-000123-1, "SMD Inductors 10uH ±20% 0.9A 0.1729Ω 1210", Case Code (Imperial)=1210, Case Code (Metric)=3225, Current Rating=900mA, DC Resistance (DCR)=172.9mR, Inductance Tolerance=20%, Max Operating Temperature=105°C, Min Operating Temperature=-40°C, Package Quantity=1000, Resistor Type=Wirewound, Self Resonant Frequency=23MHz, Test Frequency=100kHz, Case/Package=1210, Core Material=Ferrite, DC Current=900mA, Depth=2.7mm, Halogen Free="Halogen Free", Height=2.5mm, Height - Seated (Max)=0.106inch, Inductance=10uH, Lead Free="Lead Free", Length=3.4mm, Max DC Current=900mA, Military Standard=Not, Mount="Surface Mount", Number of Pins=2, Packaging="Tape and Reel", Radiation Hardening=No, Saturation Current=900mA, Series=CB, Shielding=Unshielded, Termination=SMD/SMT, Tolerance=20%, Width=0.098inch
"LDO 5V to 3.3V": library part CMP-019-00049-1, "IC REG LDO 3.3V 0.6A SOT-25"
Microcontrolleur: library part CMP-002-000002-1, "Integrated Circuit", Manufacturer_Name=Microchip, Mouser Part Number=556-ATSAME51J20A-AF, Datasheet Link=http://www.microchip.com/mymicrochip/filehandler.aspx?ddocname=en599585, Design Item ID=ATSAME51J20A-AF, Height=1.2mm, Manufacturer_Part_Number=ATSAME51J20A-AF, Mouser Price/Stock=https://www.mouser.co.uk/ProductDetail/Microchip-Technology-Atmel/ATSAME51J20A-AF?qs=y6ZabgHbY%252ByKmI%252BFD2VVtQ%3D%3D, Source=SamacSys.SchLib
P1 P2: library part CMP-1676-00001-5, "Male Header, Pitch 2.54 mm, 1 x 3 Position, Height 8.38 mm, Tail Length 3.18 mm, RoHS, Bulk", Colour=Black, Current Rating="4 A", Manufacturer=Molex, Max Operating Temperature="75 degC", Min Operating Temperature="0 degC", Package Quantity=1, Voltage Rating="250 V", ComponentLink1Description="Manufacturer URL", ComponentLink1URL=http://www.molex.com/, ComponentLink2Description=Datasheet, ComponentLink2URL=http://www.molex.com/pdm_docs/sd/022284033_sd.pdf, Contact Finish=Gold, Contact Material=Brass, Contact Plating=Gold, DatasheetVersion="Rev. G, 01/2012", Height="8.38 mm", Lead Pitch="0.1 inch", Length="7.62 mm", Mount="Through Hole", Mounting Technology="Through Hole", PackageDescription="Male Header, Pitch 2.54 mm, 1 x 3 Position, Height 8.38 mm, Tail Length 3.18 mm", PackageReference=22-28-4033, Packaging=Bulk, Pins=3, REACH SVHC=Unknown, RoHSCompliant=true, Rows=1
P3: library part CMP-1502-00584-1, "Male Locking Header WR-WTB, THT, Vertical, pitch 2.54 mm, 1 x 2 position", Contact Resistance=20mOhm, Manufacturer="Wurth Elektronik", Operating Temperature=-40to105degC, Working Voltage=250VAC, Datasheet URL=https://katalog.we-online.de/em/datasheet/6190xx11121.pdf, Gender=Male, Manufacturer URL=http://www.we-online.de, Mounting Technology=THT, Orientation=Vertical, Package Reference=61900211121, Packaging=Bag, Part Number=61900211121, Pitch=2.54mm, Position=1x2, Publisher=WurthElektronik
R1: library part CMP-1012-00760-2, "RES Thick Film, 169kΩ, 1%, 0.1W, 100ppm/°C, 0603", Case Code (Imperial)=0603, Case Code (Metric)=1608, Max Operating Temperature=155°C, Max Power Dissipation=100mW, Min Operating Temperature=-55°C, Package Quantity=10, Resistance=169kR, Temperature Coefficient=100ppm/°C, Tolerance=1%, Voltage Rating=75V, Case/Package=0603, Composition="Thick Film", Contact Plating=Tin, Depth=0.85mm, Features="Automotive AEC-Q200", Height=0.45mm, Lead Free="Lead Free", Length=1.55mm, Military Standard=Not, Number of Pins=2, Number of Terminations=2, Packaging="Tape and Reel", Power Rating=100mW, Radiation Hardening=No, Termination=SMD/SMT, Voltage Rating (DC)=75V, Weight=7.1E-05oz, Width=0.033inch, Working Voltage=75V
R2: library part CMP-2000-02522-2, "19.6kΩ ±0.5% 0.0625W 1/16W Chip Resistor 0603 (1608 Metric) Thin Film", Case Code (Imperial)=0603, Case Code (Metric)=1608, Max Operating Temperature=125°C, Max Power Dissipation=63mW, Min Operating Temperature=-55°C, Package Quantity=1, Power Rating=62.5mW, Resistance=19.6kR, Resistor Type="Thin Film", Temperature Coefficient=25ppm/°C, Tolerance=0.5%, Voltage Rating=75V, Case/Package=0603, Height=0.02inch, Lead Free="Lead Free", Length=0.063inch, Number of Terminations=2, Packaging="Tape and Reel", RoHS Compliant=Yes, Series=RR, Size Code=0603, Termination=SMD/SMT, Voltage Rating (DC)=75V, Width=0.031inch
R3: library part CMP-2000-00551-1, Manufacturer=Panasonic, Part Number=ERJ-3EKF5232V
R4: library part CMP-2000-03840-2, "RES Thick Film, 10.2kΩ, 1%, 0.1W, 100ppm/°C, 0603", Case Code (Imperial)=0603, Case Code (Metric)=1608, Max Operating Temperature=155°C, Max Power Dissipation=100mW, Min Operating Temperature=-55°C, Package Quantity=10, Resistance=10.2kR, Temperature Coefficient=100ppm/°C, Tolerance=1%, Voltage Rating=75V, Case/Package=0603, Composition="Thick Film", Contact Plating=Tin, Depth=0.85mm, Features="Automotive AEC-Q200", Height=0.45mm, Lead Free="Lead Free", Length=1.55mm, Military Standard=Not, Number of Terminations=2, Packaging="Tape and Reel", Power Rating=100mW, Radiation Hardening=No, Termination=SMD/SMT, Voltage Rating (DC)=75V, Weight=7.1E-05oz, Width=0.033inch
R5: library part CMP-2000-02521-2, "1.96kΩ ±0.5% 0.0625W 1/16W Chip Resistor 0603 (1608 Metric) Thin Film", Case Code (Imperial)=0603, Case Code (Metric)=1608, Max Operating Temperature=125°C, Max Power Dissipation=63mW, Min Operating Temperature=-55°C, Package Quantity=5000, Power Rating=62.5mW, Resistance=1.96kR, Resistor Type="Thin Film", Temperature Coefficient=25ppm/°C, Tolerance=0.5%, Voltage Rating=75V, Case/Package=0603, Height=0.02inch, Lead Free="Lead Free", Length=0.063inch, Number of Terminations=2, Packaging="Tape and Reel", RoHS Compliant=Yes, Series=RR, Size Code=0603, Termination=SMD/SMT, Voltage Rating (DC)=75V, Width=0.031inch
R6 R8 R9 R10 R11 R12 R13 R14 R15 R16: library part CMP-009-00017-4, "Chip Resistor, 10 KOhm, +/- 1%, 01 W, -55 to 155 degC, 0603 (1608 Metric)", Case/Package=0603, Max Operating Temperature=155°C, Min Operating Temperature=-55°C, Power=100mW, Tolerance=1%, Voltage Rating=50V, Mounting Technology=SM, Pins=2, RoHS Compliant=True
SD1: library part CMP-2000-05825-1, "Micro SD Card, RA, -25 to 85 degC, 8-Pin SMD, RoHS, Tape and Reel", Current Rating=500mA, Manufacturer=Molex, Package Description="8-Pin Surface Mount Device, Body 11.95 x 11.4 mm, Pitch 1.1 mm", Voltage Rating=10VAC/DC, Brand=Molex, Card Type=microSD, Contact Material=PhosphorBronze, Contact Plating=Gold, Datasheet URL=http://www.molex.com/pdm_docs/sd/1040310811_sd.pdf, Datasheet Version="Rev. E, 04/2006", Height=1.42mm, Housing Material=LiquidCrystalPolymer(LCP), Insertion - Extraction Style=Push-Pull, Length=11.4mm, Manufacturer URL=http://www.molex.com/, Mating Cycles=10000, Mounting Technology=SurfaceMount, Mounting Type=Standard, Number of Contacts=8, Number of Rows=1Row, Orientation=RightAngle, Package Reference=104031-0811, Packaging=Reel, Pitch=1.1mm, Product=CardConnectors, Product Category=MemoryCardConnectors, RoHS=True, Series=104031, Termination Style=SMD
SJ1 SJ2 SJ3 SJ4 SJ5 SJ6 SJ7: library part CMP-002-00075-2, "custom solder bridge"
SW1: library part CMP-2000-07511-1, "FSMSM Push Button Switch, 50 mA, -35 to 85 degC, 2-Pin SMD, RoHS, Bulk", Case\/Package=SMD/SMT, Contact Current Rating=50mA, Contact Resistance=100mOhm, Manufacturer="TE Connectivity", Max Operating Temperature=85degC, Max Voltage Rating (DC)=12V, Min Operating Temperature=-35degC, Operating Force=180gf, Package Description="2-Pin Surface Mount Device, Body 6 x 3.5 mm, Pitch 9.19 mm", Package Quantity=1000, Voltage Rating (DC)=24V, Actuator Length=1.07mm, Actuator Material=Polyamide, Contact Material=Brass, Contact Plating=Silver, Current Rating=50mA, Datasheet URL=http://www.te.com/commerce/DocumentDelivery/DDEController?Action=showdoc&DocId=Customer+Drawing%7F1437566-3%7FC2%7Fpdf%7FEnglish%7FENG_CD_1437566-3_C2_1437566_3_1_c.dwg.pdf%7F1437566-3, Datasheet Version="Rev. C2, 08/2014", Electrical Life=20000Cycles, ELV=Compliant, Illumination Type=Illuminated, Lead Free=LeadFree, Manufacturer URL=http://www.te.com/, Mechanical Life=20000Cycles, Mount=SurfaceMount, Mounting Technology=SurfaceMount, Orientation=Straight, Package Reference=FSMSM, Packaging=LoosePiece, REACH SVHC=Unknown, RoHSCompliant=true, Switch Travel=0.25mm, Termination=GullWing, Throw Configuration=SPST
X1: library part CMP-003-00029-1, "Crystal 32.768kHz 10ppm 7pF -40C +85CABS07-166-32.768KHZ-T", Frequency=32.768kHz, Pins=2

## Via types
v1: diameter 1.27, hole 0.711, Top Layer to Bottom Layer, 97 vias

## Nets (pads, with @x,y where several pads share a name; then routed paths per layer and width w, separated by ;. In a path a pad name is that pad's centre, name@x,y a point inside that pad or via, vN(x,y) a via of type N, cw(c..) or ccw(c..) an arc to the next point about the centre after c; other vN are vias at no path point)
+3.3: "CAN tranciever 1.3" "CAN tranciever 2.3" "LDO 5V to 3.3V.5" C9.2 C15.2 C16.2 C17.2 C18.2 C21.2 C23.2 C24.2 C25.2 FB1.1 J7.3 J8.3 JTAG.1 Microcontrolleur.21 Microcontrolleur.34 Microcontrolleur.48 Microcontrolleur.56 P3.1 R6.1 R8.1 R9.1 R10.1 R11.1 R12.1 R13.1 R14.1 R15.1 R16.1 | length 331.1
  Top Layer w0.15: 10.947,46.696 11.301,47.05 Microcontrolleur.48@12.677,47.05 ; 11.201,54.482 11.633,54.05 Microcontrolleur.34@12.677,54.05 ; Microcontrolleur.56@18.165,45.062 18.165,44.018 18.438,43.745 19.501,43.745 19.837,43.409 ; Microcontrolleur.21@20.165,56.538 20.165,57.743 C15.2@20.639,58.217
  Top Layer w0.254: J8.3@4.953,15.875 8.103,15.875 8.581,16.353 8.581,19.105 7.997,19.689 7.997,21.055 7.645,21.407 7.645,44.054 ; R6.1@10.287,42.164 10.287,42.901 10.008,42.901 10.008,41.961 9.728,41.681 8.509,41.681 7.976,42.215 7.976,44.385 ; C16.2@10.287,53.848 10.947,53.848 11.201,54.102 11.201,54.482 11.201,56.239 10.414,57.026 v1(10.414,58.953) JTAG.1@10.414,62.357 ; 10.947,46.696 C17.2@10.287,46.696 C17.2@10.115,46.524 ; v1(13.259,36.881) 16.561,36.881 ; v1(16.358,25.984) 17.196,25.984 18.39,27.178 v1(18.39,27.711) ; C18.2@18.241,42.418 18.241,41.732 16.789,40.281 16.789,37.109 16.561,36.881 ; 19.837,43.409 19.837,37.263 19.455,36.881 16.561,36.881 ; C15.2@20.639,58.217 C15.2@20.639,58.547 20.639,59.055 20.066,59.628 20.066,61.493 20.599,62.027 25.476,62.027 P3.1@28.956,58.547 ; FB1.1@31.736,51.308 31.736,50.509 32.079,50.166 C21.2@35.814,50.166 35.814,52.476 35.568,52.723 R15.1@35.568,55.038 ; R16.1@33.282,55.038 34.341,55.038 ; v1(34.341,59.284) 34.341,55.038 ; v1(38.379,26.06) 35.712,26.06 33.909,27.864 33.909,36.51 40.198,42.799 40.198,43.429 40.198,44.272 40.448,44.522 C9.2@40.448,45.404 ; R10.1@42.823,59.563 42.823,59.461 43.307,59.461 43.307,55.292 43.053,55.038 ; R12.1@44.831,54.991 44.145,54.991 ; J7.3@49.911,12.954 48.743,14.122 48.743,16.053 49.555,16.866 50.648,16.866 51.077,17.295 51.077,19.002 50.673,19.406 49.149,19.406 45.845,22.709 45.845,31.603 47.523,33.281 47.523,50.355 46.304,51.574 R11.1@44.831,51.574 44.272,51.574 43.942,51.904 43.942,54.788 44.145,54.991 ; 7.645,44.054 7.976,44.385 ; 7.645,44.054 7.645,46.148 v1(8.193,46.696) C17.2@10.115,46.524 ; 7.976,44.385 C17.2@10.115,46.524 ; 34.341,55.038 R15.1@35.568,55.038 ; R15.1@35.568,55.038 36.652,55.038 36.777,55.164 C25.2@37.879,55.164 38.938,55.164 39.063,55.038 R14.1@40.14,55.038 R13.1@42.426,55.038 43.053,55.038 ; 43.053,55.038 43.586,55.038 43.634,54.991 44.145,54.991
  Bottom Layer w0.254: J8.3@4.953,15.875 6.195,15.875 6.271,15.799 8.991,15.799 10.743,17.551 16.407,17.551 18.263,19.407 R8.1@18.923,19.407 18.923,27.178 v1(18.39,27.711) ; v1(10.414,58.953) 6.604,55.143 4.343,55.143 3.785,54.585 3.785,50.825 4.445,50.165 8.033,50.165 8.414,49.784 8.414,46.917 v1(8.193,46.696) 9.944,46.696 12.29,49.043 12.29,53.53 15.876,57.115 17.247,57.115 18.654,58.522 25.146,58.522 25.171,58.547 P3.1@28.956,58.547 29.947,59.538 34.087,59.538 v1(34.341,59.284) ; v1(13.259,36.881) 16.154,36.881 16.586,36.449 16.586,25.984 16.586,25.095 16.358,24.867 ; 15.367,20.398 C23.2@15.367,23.876 16.358,24.867 ; v1(16.358,25.984) 16.358,24.867 ; v1(38.379,26.06) 40.386,24.054 C24.2@40.386,23.368 40.386,21.946 40.259,21.819 40.259,20.398 40.259,18.009 40.86,17.408 42.097,17.408 43.334,18.645 R9.1@43.942,18.645 48.261,14.326 49.555,14.326 49.911,13.97 J7.3@49.911,12.954
+5: "LDO 5V to 3.3V.1" "LDO 5V to 3.3V.3" C5.1 C6.1 C7.1 C8.2 J7.2 J8.2 L1.2 R4.2 | length 119.1
  Top Layer w0.254: L1.2@35.763,31.565 38.862,31.565 C7.1@40.19,32.893 ; R4.2@36.147,22.409 37.998,22.409 38.113,22.294 C5.1@40.015,22.294 ; 40.19,30.201 C6.1@40.19,27.559 40.19,24.991 40.015,24.816 C5.1@40.015,22.294 ; 40.19,30.201 C7.1@40.19,32.893 ; 40.198,41.029 40.198,40.345 ; v1(41.275,18.44) 40.015,19.701 C5.1@40.015,22.294 ; 42.098,41.029 42.098,40.361 41.869,40.132 40.411,40.132 40.198,40.345 ; C7.1@40.19,32.893 40.19,35.712 40.448,35.971 C8.2@40.448,38.8 40.198,40.345
  Bottom Layer w0.254: J8.2@4.953,13.335 3.785,12.167 3.785,2.591 5.98,0.395 43.956,0.395 44.679,1.118 44.679,5.182 J7.2@49.911,10.414 51.079,11.582 51.079,18.821 50.495,19.406 46.888,19.406 46.863,19.431 42.443,19.431 41.453,18.44 v1(41.275,18.44)
+24: "Buck converter : 24V to 3.3V.2" C1.2 C22.1 J7.1 J8.1 P1.2 R1.2 | length 91.9
  Top Layer w0.254: J8.1@4.953,10.795 4.953,5.385 9.589,0.749 26.048,0.749 26.391,1.092 26.619,1.092 P1.2@27.432,1.905 28.956,0.381 48.565,0.381 49.911,1.727 J7.1@49.911,7.874 ; C1.2@14.303,22.56 14.961,22.56 16.179,23.779 R1.2@16.843,23.779 17.395,23.779 19.006,22.167 19.846,22.167 20.911,22.167 22.225,20.853 22.225,16.002 v1(24.079,14.148)
  Bottom Layer w0.254: v1(24.079,14.148) 24.079,13.678 25.921,11.836 25.921,9.63 25.79,9.5 25.79,5.613 26.104,5.299 C22.1@27.559,5.299 27.559,3.658 27.432,3.531 P1.2@27.432,1.905